# EAGLE board up_down_buttons (EAGLE 7.2.0)
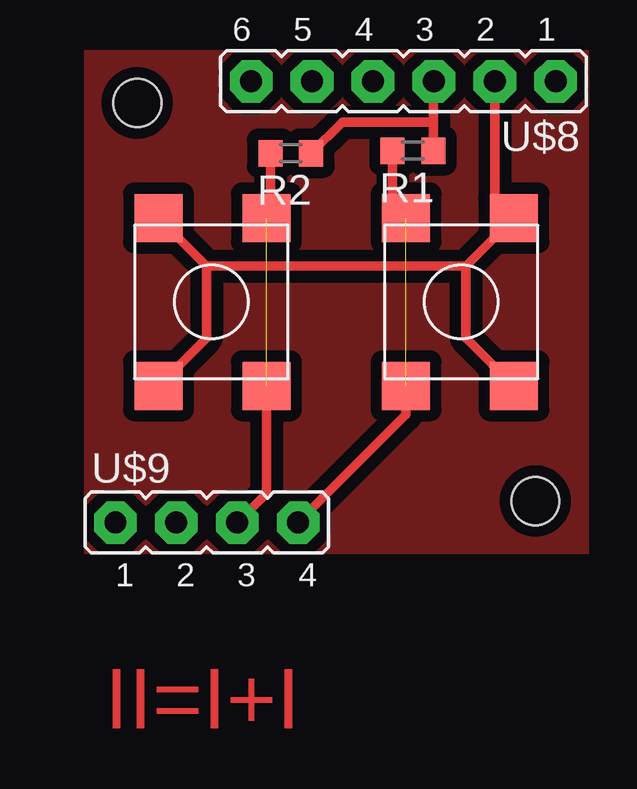
[diagram p0: board, top side]
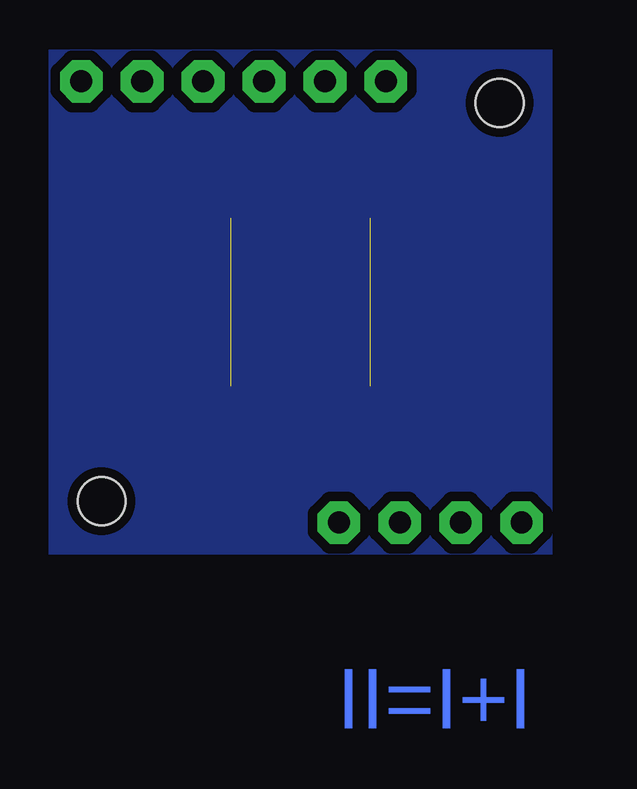
[diagram p1: board, bottom side, seen from below]

No outline drawn. Coordinates in mm, seen from the top.
Copper layers (1*16): Top 0.035mm / dielectric 1.5mm / Bottom 0.035mm
Design rules "default *": minimum track width 10mil, minimum drill 24mil, track to track 8mil, track to pad 8mil, pad to pad 8mil, via to via 8mil, smd to smd 8mil, copper to edge 0mil, drill to drill 1mil, minimum pad ring 10mil, minimum via ring 8mil, stop-mask expansion 4mil, vias tented up to drill 0mil, thermal gap 10mil
Net classes: 0 default: clearance 0.205 mm
Holes 2 mm at 2.2,18.8 18.8,2.2

## Footprints (pad centres in the part's own frame; a part is rotated, then mirrored left to right if it is on the bottom)
R0603 = smd 1 x 1.1: 1 -0.85,0; 2 0.85,0
BUTTON_6.2X6.2 = smd 2 x 2: P$1 -2.21,-3.5; P$2 2.29,-3.5; P$3 -2.21,3.5; P$4 2.29,3.5
JUMPER6M = drill 0.914 pad 1.778 octagon: 1 -6.35,0; 2 -3.81,0; 3 -1.27,0; 4 1.27,0; 5 3.81,0; 6 6.35,0
JUMPER4M = drill 0.914 pad 1.778 octagon: 1 -3.81,0; 2 -1.27,0; 3 1.27,0; 4 3.81,0

## Placement (x,y rotation side)
R1  100k  [R0603]  13.7,16.8 180 top
R2  100k  [R0603]  8.6,16.7 180 top
U$1  BUTTON_6.3X6.3  [BUTTON_6.2X6.2]  15.7,10.5 180 top
U$2  BUTTON_6.3X6.3  [BUTTON_6.2X6.2]  5.3,10.5 0 top
U$8  JUMPER6M  [JUMPER6M]  13.3,19.7 180 top
U$9  JUMPER4M  [JUMPER4M]  5.1,1.3 0 top

## Library data of the parts
R1 R2 = resistor
U$1 U$2 U$8 U$9 = !stavebnice03

## Nets
N$1: R2.2 U$2.P$2 U$2.P$4 U$9.3
N$2: U$1.P$1 U$1.P$3 U$2.P$1 U$2.P$3 U$8.2
N$3: R1.1 R2.1 U$8.3
N$4: R1.2 U$1.P$2 U$1.P$4 U$9.4

## Tracks (layer width: path | path; a pad name or v marks a point on that pad's centre or on a via)
GND
  pour Top (isolate 0.483, rank 2, no thermals): 0,0 0,21 21,21 21,0
  pour Bottom (isolate 0.406, rank 2, no thermals): 0,0 0,21 21,21 21,0
N$1  (1 unrouted)
  Top 0.4: 7.65,14.06 U$2.P$4 7.75,14.16 R2.2 | U$2.P$2 7.59,2.52 U$9.3
N$2
  Top 0.4: U$8.2 17.11,14.8 U$1.P$1 | U$1.P$1 17.91,13.41 | U$2.P$3 5.09,12 | 5.09,12 15.91,12 | 15.91,12 U$1.P$1 | 5.09,12 5.09,9 U$2.P$1 | 15.91,12 15.91,9 U$1.P$3
N$3
  Top 0.4: U$8.3 14.55,19.68 14.55,18 | 14.55,18 R1.1 | R2.1 10.75,18 14.55,18
N$4  (1 unrouted)
  Top 0.4: R1.2 12.85,14.56 U$1.P$2 | U$1.P$4 13.41,5.8 U$9.4

## Text on the board
Top: II=I+I
Bottom: II=I+I
Dimension: rgb extension